# EAGLE board LevelSensor (EAGLE 9.5.2)
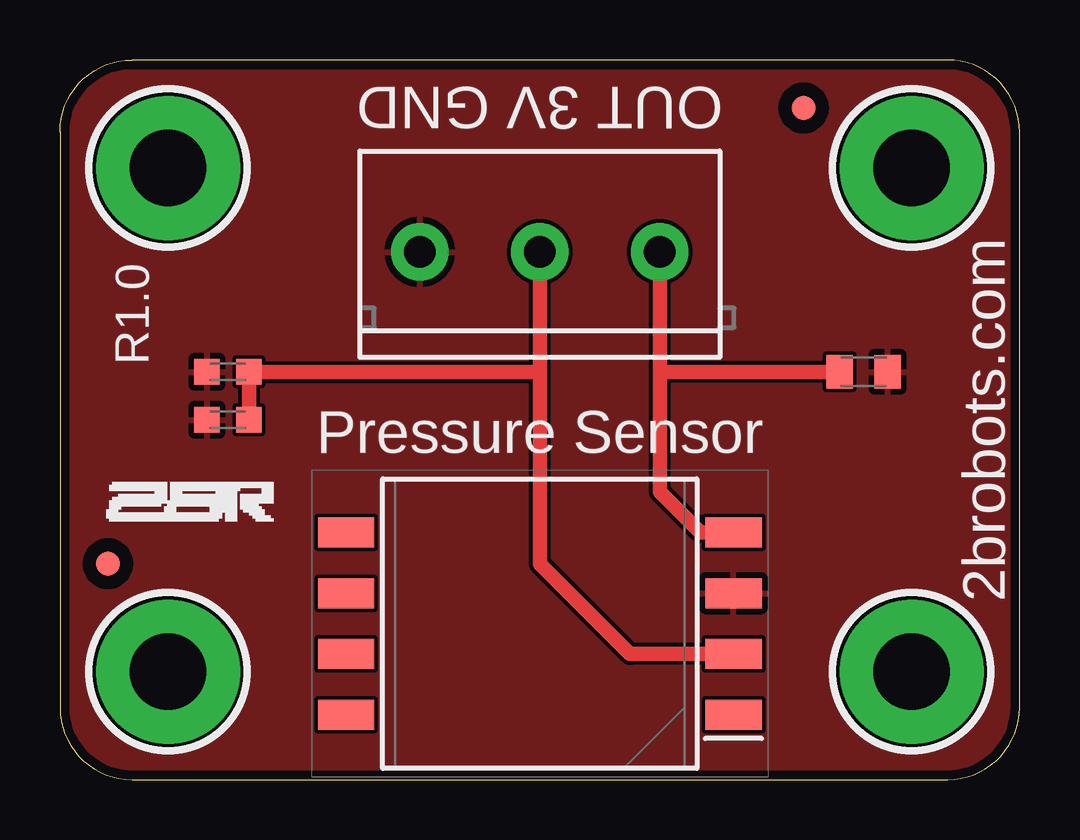
[diagram p0: board, top side]
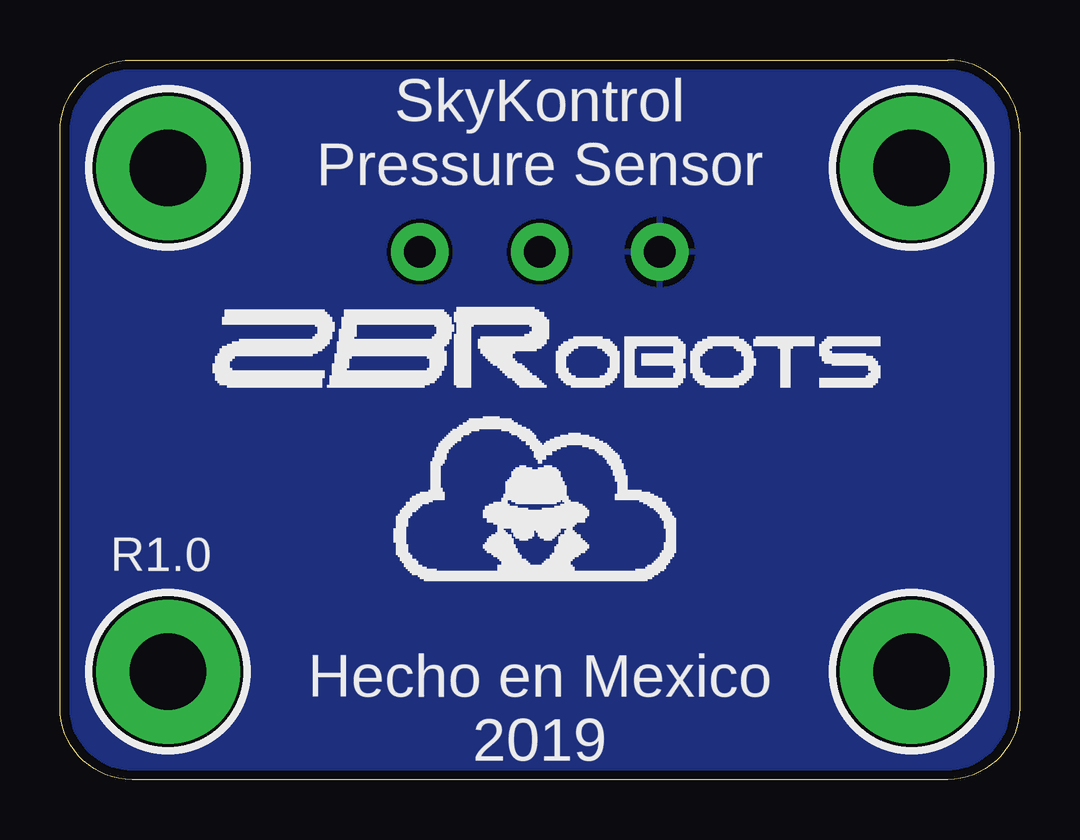
[diagram p1: board, bottom side, seen from below]

Size 40 x 30 mm. Coordinates in mm from the lower left corner, seen from the top.
Outline: 3,0 37,0 arc90 40,3 40,27 arc90 37,30 3,30 arc90 0,27 0,3 arc90 3,0
Copper layers (1*16): Top 0.0356mm / dielectric 1.5011mm / Bottom 0.0356mm
Design rules "2brobots-2layer": minimum track width 6mil, minimum drill 0.3mm, track to track 6mil, track to pad 6mil, pad to pad 6mil, via to via 6mil, smd to smd 6mil, copper to edge 15mil, drill to drill 6mil, minimum pad ring 7mil, minimum via ring 7mil, stop-mask expansion 2.5mil, vias tented up to drill 50mil, thermal gap 10mil

## Footprints (pad centres in the part's own frame; a part is rotated, then mirrored left to right if it is on the bottom)
C0603K = smd 1.05 x 1.08: 1 -0.875,0; 2 0.875,0
C0805K = smd 1.1 x 1.4: 1 -1,0; 2 1,0
SOP254P1753X991-8N = smd 2.35 x 1.25: 1 -8.075,3.81; 2 -8.075,1.27; 3 -8.075,-1.27; 4 -8.075,-3.81; 5 8.075,-3.81; 6 8.075,-1.27; 7 8.075,1.27; 8 8.075,3.81
SCREWTERMINAL-5MM-3 = drill 1.3 pad 2.413: 1 -5,0; 2 0,0; 3 5,0
FIDUCIAL_1MM = smd 1 x 1: 1 0,0

## Placement (x,y rotation side)
C1  100nF  [C0603K]  7,17 180 top
C2  1uF  [C0603K]  7,15 180 top
C3  470pF  [C0805K]  33.5,17 0 top
IC1  MP3V5050DP  [SOP254P1753X991-8N]  20,6.5 180 top
J1  [SCREWTERMINAL-5MM-3]  20,22 0 top
U$2  FIDUCIAL  [FIDUCIAL_1MM]  2,9 0 top
U$3  FIDUCIAL  [FIDUCIAL_1MM]  31,28 0 top

## Library data of the parts
C1-C3 U$2 U$3 = adafruit
IC1 = SamacSys_Parts; DESCRIPTION: NXP - MP3V5050DP - PRESSURE SENSOR, 0-50KPA, SOP-8; HEIGHT: 9.906mm; MANUFACTURER_NAME: Nexperia; MANUFACTURER_PART_NUMBER: MP3V5050DP; MOUSER_PART_NUMBER: 841-MP3V5050DP; MOUSER_PRICE-STOCK: https://www.mouser.com/Search/Refine.aspx?Keyword=841-MP3V5050DP
J1 = SparkFun-Connectors; PROD_ID: CONN-10134; SF_SKU: PRT-08433

## Nets
3V: C1.1 C2.1 IC1.2 J1.2
GND: C1.2 C2.2 C3.2 IC1.3 J1.1
OUT: C3.1 IC1.4 J1.3

## Tracks (layer width: path | path; a pad name or v marks a point on that pad's centre or on a via)
3V
  Top 0.61: 20,17 20,9 23.77,5.23 IC1.2 | 20,17 J1.2 | C2.1 C1.1 20,17
GND
  pour Top: 0,30 40,30 40,0 0,0
  pour Bottom: 0,30 0,0 40,0 40,30
N$4  (via drill 3.2 pad 6)
  other vias: 35.5,4.5
N$5  (via drill 3.2 pad 6)
  other vias: 4.5,25.5
N$6  (via drill 3.2 pad 6)
  other vias: 4.5,4.5
N$7  (via drill 3.2 pad 6)
  other vias: 35.5,25.5
OUT
  Top 0.61: 25,17 J1.3 | C3.1 25,17 | IC1.4 26.69,10.31 25,12 25,17

## Text on the board
tPlace: OUT 3V GND | R1.0 | 2brobots.com | Pressure Sensor
bPlace: SkyKontrol / Pressure Sensor | R1.0 | Hecho en Mexico / 2019